# EAGLE board Projet electronique final construct- PIC-PIR - Groupe 5 (EAGLE 9.6.2)
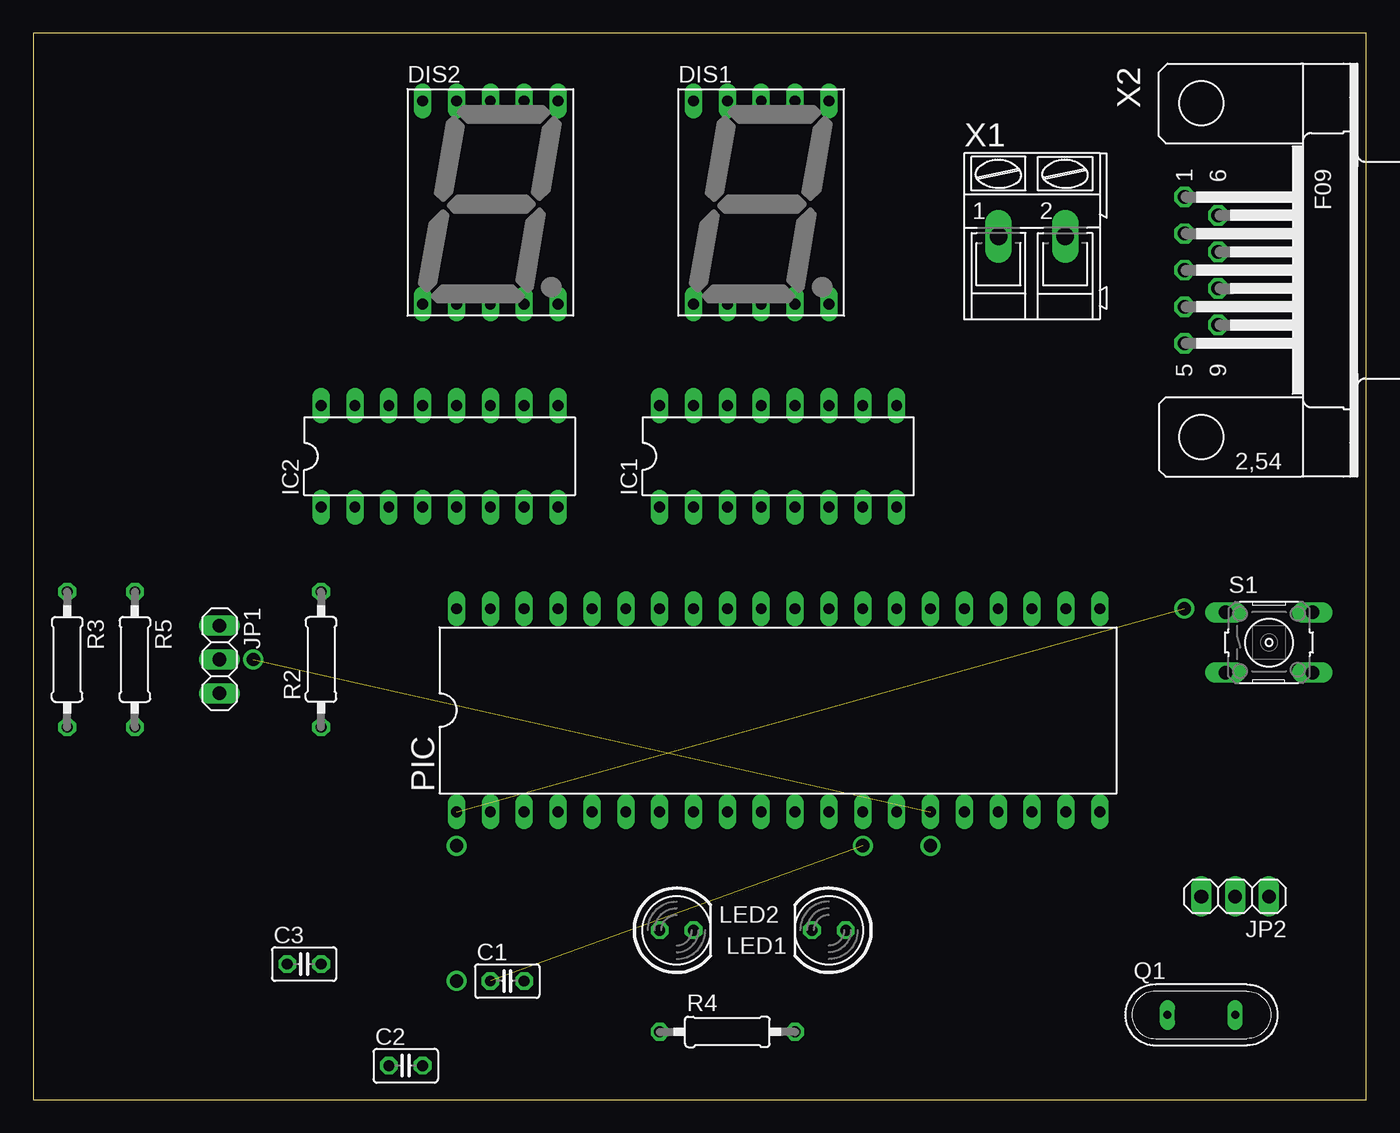
[diagram p0: board, top side]
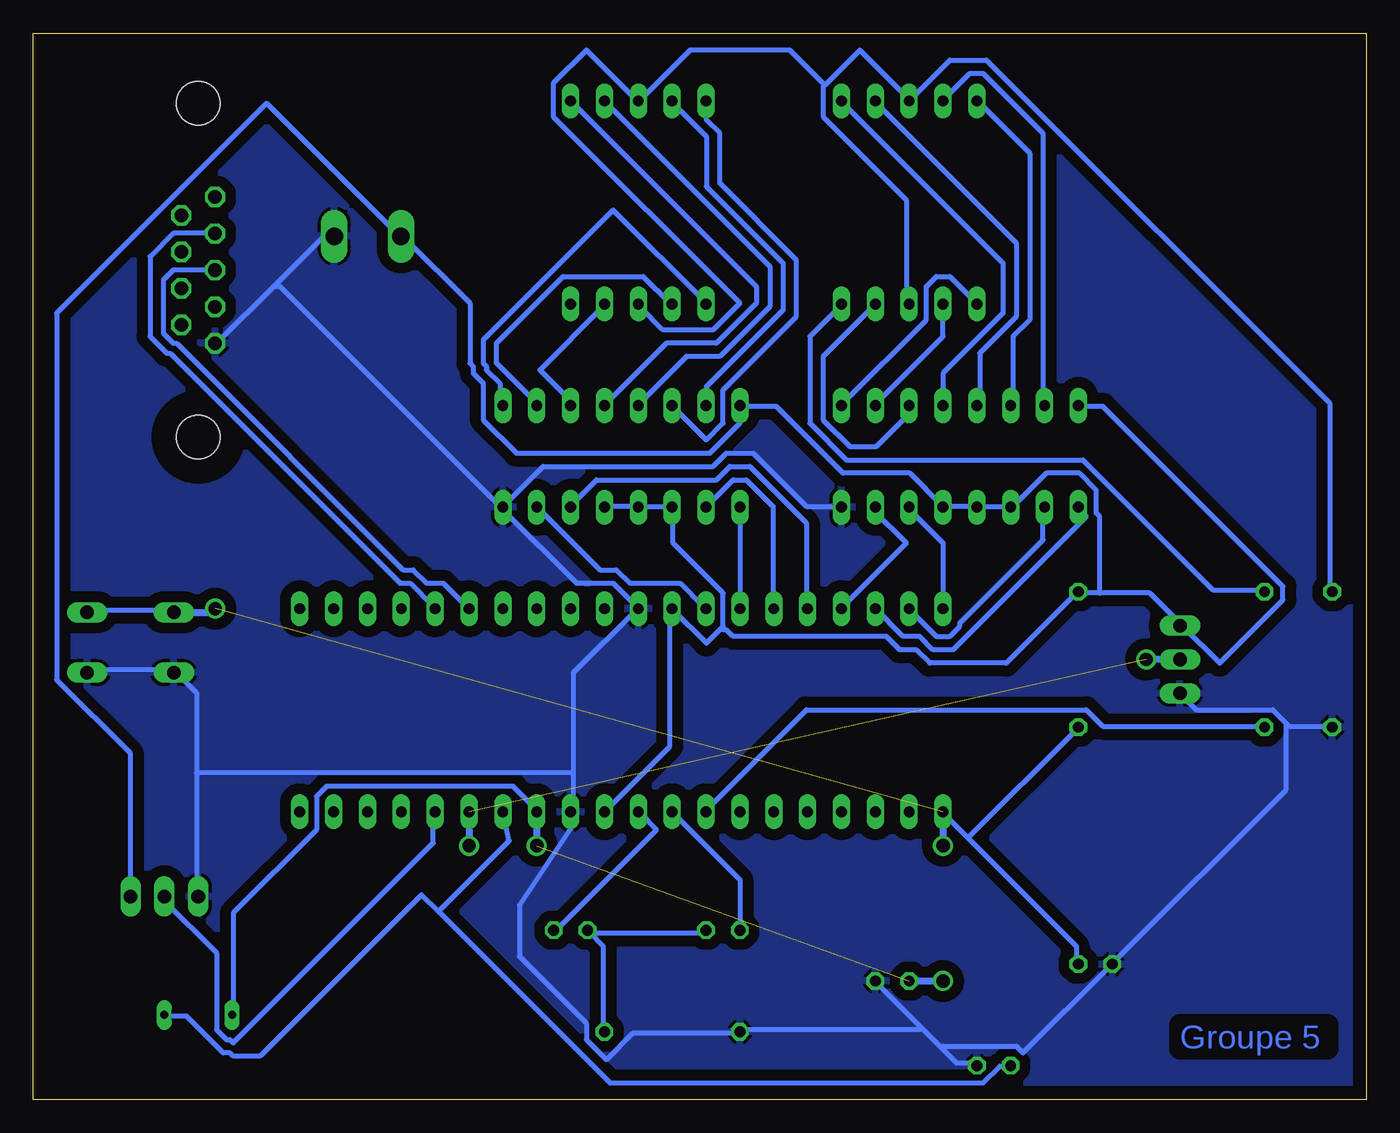
[diagram p1: board, bottom side, seen from below]

Size 100 x 80 mm. Coordinates in mm from the lower left corner, seen from the top.
Outline: 0,0 100,0 100,80 0,80 0,0
Copper layers (1*16): Top 0.035mm / dielectric 1.5mm / Bottom 0.035mm
Design rules "default *": minimum track width 15mil, minimum drill 0.35mm, track to track 15mil, track to pad 15mil, pad to pad 15mil, via to via 15mil, smd to smd 6mil, copper to edge 40mil, drill to drill 6mil, minimum pad ring 10mil, minimum via ring 8mil, stop-mask expansion 4mil, vias tented up to drill 0mil, thermal gap 10mil

## Footprints (pad centres in the part's own frame; a part is rotated, then mirrored left to right if it is on the bottom)
C025-025X050 = drill 0.813 octagon: 1 -1.27,0; 2 1.27,0
HDSP-M = drill 0.813 long: 1 -5.08,-7.62; 2 -2.54,-7.62; 3 0,-7.62; 4 2.54,-7.62; 5 5.08,-7.62; 6 5.08,7.62; 7 2.54,7.62; 8 0,7.62; 9 -2.54,7.62; 10 -5.08,7.62
DIL16 = drill 0.813 long: 1 -8.89,-3.81; 2 -6.35,-3.81; 3 -3.81,-3.81; 4 -1.27,-3.81; 5 1.27,-3.81; 6 3.81,-3.81; 7 6.35,-3.81; 8 8.89,-3.81; 9 8.89,3.81; 10 6.35,3.81; 11 3.81,3.81; 12 1.27,3.81; 13 -1.27,3.81; 14 -3.81,3.81; 15 -6.35,3.81; 16 -8.89,3.81
1X03 = drill 1.016 long: 1 -2.54,0; 2 0,0; 3 2.54,0
LED5MM = drill 0.813 octagon: A -1.27,0; K 1.27,0
DIL40 = drill 0.813 long: 1 -24.13,-7.62; 2 -21.59,-7.62; 3 -19.05,-7.62; 4 -16.51,-7.62; 5 -13.97,-7.62; 6 -11.43,-7.62; 7 -8.89,-7.62; 8 -6.35,-7.62; 9 -3.81,-7.62; 10 -1.27,-7.62; 11 1.27,-7.62; 12 3.81,-7.62; 13 6.35,-7.62; 14 8.89,-7.62; 15 11.43,-7.62; 16 13.97,-7.62; 17 16.51,-7.62; 18 19.05,-7.62; 19 21.59,-7.62; 20 24.13,-7.62; 21 24.13,7.62; 22 21.59,7.62; 23 19.05,7.62; 24 16.51,7.62; 25 13.97,7.62; 26 11.43,7.62; 27 8.89,7.62; 28 6.35,7.62; 29 3.81,7.62; 30 1.27,7.62; 31 -1.27,7.62; 32 -3.81,7.62; 33 -6.35,7.62; 34 -8.89,7.62; 35 -11.43,7.62; 36 -13.97,7.62; 37 -16.51,7.62; 38 -19.05,7.62; 39 -21.59,7.62; 40 -24.13,7.62
QS = drill 0.61 long: 1 -2.54,0; 2 2.54,0
0207/10 = drill 0.813 octagon: 1 -5.08,0; 2 5.08,0
B3F-10XX = drill 1.016 long: 1 -3.251,2.261; 2 3.251,2.261; 3 -3.251,-2.261; 4 3.251,-2.261
AK300/2 = drill 1.321 long: 1 -2.515,0; 2 2.489,0
F09H = drill 1.016 octagon: 1 -5.486,-1.27; 2 -2.743,-1.27; 3 0,-1.27; 4 2.743,-1.27; 5 5.486,-1.27; 6 -4.115,1.27; 7 -1.372,1.27; 8 1.372,1.27; 9 4.115,1.27 | hole 3.302: -12.522,0; 12.522,0

## Placement (x,y rotation side)
C1  [C025-025X050]  35.56,8.89 0 top
C2  [C025-025X050]  27.94,2.54 0 top
C3  [C025-025X050]  20.32,10.16 0 top
DIS1  HD-H103  [HDSP-M]  54.61,67.31 0 top
DIS2  HD-H103  [HDSP-M]  34.29,67.31 0 top
IC1  4511N  [DIL16]  55.88,48.26 0 top
IC2  4511N  [DIL16]  30.48,48.26 0 top
JP1  [1X03]  13.97,33.02 270 top
JP2  [1X03]  90.17,15.24 180 top
LED1  [LED5MM]  59.69,12.7 180 top
LED2  [LED5MM]  48.26,12.7 0 top
PIC  PIC16F877P  [DIL40]  55.88,29.21 0 top
Q1  [QS]  87.63,6.35 0 top
R2  [0207/10]  21.59,33.02 90 top
R3  [0207/10]  2.54,33.02 270 top
R4  [0207/10]  52.07,5.08 0 top
R5  [0207/10]  7.62,33.02 270 top
S1  [B3F-10XX]  92.71,34.29 0 top
X1  [AK300/2]  74.93,64.77 0 top
X2  [F09H]  87.63,62.23 270 top

## Library data of the parts
C1-C3 = rcl; SPICEPREFIX: C
DIS1 DIS2 = display-hp; OC_FARNELL: unknown; OC_NEWARK: unknown
IC1 IC2 = 45xx
JP1 JP2 = pinhead
LED1 LED2 = led
PIC = microchip; MF: MICROCHIP; MPN: PIC16F877-04/P; OC_FARNELL: 9761349; OC_NEWARK: 61K3463
Q1 = special
R2-R5 = rcl; SPICEPREFIX: R
S1 = switch-omron; MPN: B3F-1000; OC_FARNELL: 176432; OC_NEWARK: 36M3542
X1 = con-ptr500; OC_FARNELL: unknown; OC_NEWARK: unknown
X2 = con-subd; OC_FARNELL: unknown; OC_NEWARK: unknown

## Nets
GND: C1.2 C2.2 C3.1 IC1.8 IC2.8 JP1.3 JP2.3 PIC.12 PIC.31 R3.2 R4.1 S1.3 S1.4 X1.2 X2.5
N$1: C2.1 PIC.14 Q1.2
N$2: C1.1 PIC.13 Q1.1
N$3: C3.2 PIC.1 R2.1 S1.1 S1.2
N$4: IC1.7 PIC.33
N$5: IC1.1 PIC.34
N$6: IC1.2 PIC.35
N$7: IC1.6 PIC.36
N$8: IC2.7 PIC.37
N$9: IC2.1 PIC.38
N$10: IC2.2 PIC.39
N$11: IC2.6 PIC.40
N$12: DIS1.7 IC1.13
N$13: DIS1.6 IC1.12
N$14: DIS1.4 IC1.11
N$15: DIS1.2 IC1.10
N$16: DIS1.1 IC1.9
N$17: DIS1.9 IC1.15
N$18: DIS1.10 IC1.14
N$19: DIS2.7 IC2.13
N$20: DIS2.6 IC2.12
N$21: DIS2.4 IC2.11
N$22: DIS2.2 IC2.10
N$23: DIS2.1 IC2.9
N$24: DIS2.9 IC2.15
N$25: DIS2.10 IC2.14
N$26: DIS1.3 DIS1.8 DIS2.3 DIS2.8 R3.1
N$27: LED1.K LED2.K R4.2
N$28: DIS2.5 R5.1
RC0: JP1.2 PIC.15
RC1: JP2.2 PIC.16
RE0: PIC.8 R5.2
RE1: LED2.A PIC.9
RE2: LED1.A PIC.10
RX: PIC.26 X2.3
TX: PIC.25 X2.2
VCC: IC1.3 IC1.4 IC1.5 IC1.16 IC2.3 IC2.4 IC2.5 IC2.16 JP1.1 JP2.1 PIC.11 PIC.32 R2.2 X1.1

## Tracks (layer width: path | path; a pad name or v marks a point on that pad's centre or on a via)
GND
  Bottom 0.381: 5.88,28.12 7,29.25 12.75,29.25 13.75,30.25 JP1.3 | 5.88,28.12 5.75,28 2.75,28 R3.2 | 33.38,5.38 36.75,8.75 C1.2 | 33.38,5.38 31.88,3.88 | 31.88,3.88 30.75,2.75 29.25,2.75 C2.2 | 31.88,3.88 31.75,4 26.25,4 25.75,3.5 19.25,10 C3.1 19,10.25 6,23.25 6,28 5.88,28.12 | 33.38,5.38 33.5,5.25 46.75,5.25 R4.1 47,5 55,5 57,3 58.5,4.5 58.5,5.71 63.52,10.73 63.52,14.57 59.69,20.32 PIC.12 59.5,21.75 59.5,24.5 | 87.75,24.5 87.75,30.5 89.25,32 S1.3 89.5,32.25 95.75,32.25 S1.4 | 87.75,24.5 87.75,15.25 JP2.3 | 81.88,61.12 77.75,65.25 77.5,65 X1.2 | 81.88,61.12 86.25,56.75 X2.5 | IC2.8 39.5,44.5 42,44.5 46,48.5 48,48.5 49,47.5 61.75,47.5 64.75,44.5 IC1.8 | IC1.8 64.75,44.25 59.25,38.75 56.5,38.75 54.75,37 PIC.31 54.75,36.75 59.5,32 59.5,24.5 | 81.88,61.12 81.75,61 81.5,61 65,44.5 IC1.8 | 59.5,24.5 87.75,24.5
  pour Bottom (isolate 0.813): 0,80.01 100.33,80.01 100.33,0 0,0
N$1
  Bottom 0.381: 69.61,14.11 64.29,19.42 PIC.14 | Q1.2 90,6.25 88.5,6.25 85.75,3.5 85.25,3.5 85,3.25 83,3.25 70.88,15.38 69.61,14.11 | 69.61,14.11 56.75,1.25 28.75,1.25 27.5,2.5 26.75,2.5 C2.1
N$2  (1 unrouted)
  Bottom 0.381: Q1.1 85,6.5 85,14 78.75,20.25 78.75,22.75 78,23.5 64,23.5 62.25,21.75 PIC.13
  Bottom 0.508: C1.1 31.75,8.89 | PIC.13 62.23,19.05
N$3  (1 unrouted)
  Bottom 0.381: 29.88,19.62 31.75,21.5 PIC.1 | 29.88,19.62 21.75,11.5 21.75,10.25 C3.2 | 29.88,19.62 21.75,27.75 R2.1 | S1.1 89.5,36.75 95.75,36.75 S1.2
  Bottom 0.508: S1.1 86.64,36.55 86.36,36.83 | PIC.1 31.75,19.05
N$4
  Bottom 0.381: PIC.33 49.75,37 51.5,38.75 55.25,38.75 56.25,39.75 57.5,39.75 62,44.25 IC1.7
N$5
  Bottom 0.381: PIC.34 47,37 47,44.25 IC1.1
N$6
  Bottom 0.381: PIC.35 44.5,37 44.5,44.5 46.5,46.5 47.5,46.5 49.5,44.5 IC1.2
N$7
  Bottom 0.381: PIC.36 42,37 42,43.25 46.25,47.5 47.75,47.5 48.75,46.5 57.75,46.5 59.75,44.5 IC1.6
N$8
  Bottom 0.381: PIC.37 39.25,37 34.5,41.75 37,44.25 IC2.7
N$9
  Bottom 0.381: PIC.38 34.75,34.75 33.5,34.75 32.5,33.75 31,33.75 21,43.75 21.5,44.25 IC2.1
N$10
  Bottom 0.381: IC2.2 24.25,44.25 24.25,42 30.5,35.75 30.5,35.5 31.25,34.75 32.25,34.75 34.25,36.75 PIC.39
N$11
  Bottom 0.381: PIC.40 31.75,41.75 34.25,44.25 IC2.6
N$12
  Bottom 0.381: IC1.13 54.5,52.25 51,55.75 48.5,55.75 44.75,59.5 44.75,62.5 57,74.75 DIS1.7
N$13
  Bottom 0.381: IC1.12 57,52.25 52.5,56.75 48.75,56.75 45.75,59.75 45.75,61 59.5,74.75 DIS1.6
N$14
  Bottom 0.381: DIS1.4 57.25,59.5 62,54.75 59.5,52.25 IC1.11
N$15
  Bottom 0.381: DIS1.2 52.25,59.75 54.25,61.75 60.25,61.75 65.25,56.75 65.25,55.25 62.25,52.25 IC1.10
N$16
  Bottom 0.381: IC1.9 65,52.25 65,53.75 66,54.75 66,55 66.25,55.25 66.25,57 56.5,66.75 49.5,59.75 DIS1.1
N$17
  Bottom 0.381: IC1.15 49.5,52.25 49.5,53.5 43.75,59.25 43.75,62.75 49.5,68.5 49.5,72.25 52,74.75 DIS1.9
N$18
  Bottom 0.381: IC1.14 49.5,49.5 48.25,50.75 48.25,53.25 42.75,58.75 42.75,63 48.5,68.75 48.5,72.5 49.5,73.5 49.5,74.75 DIS1.10
N$19
  Bottom 0.381: IC2.13 29,52.25 29,56 26.25,58.75 26.25,64.25 36.75,74.75 DIS2.7
N$20
  Bottom 0.381: IC2.12 31.75,54.5 27.25,59 27.25,62.75 39.25,74.75 DIS2.6
N$21
  Bottom 0.381: IC2.11 34.5,52 34.5,51.25 36.75,49 38.75,49 40.75,51 40.75,55.75 37,59.5 DIS2.4
N$22
  Bottom 0.381: DIS2.2 31.75,57.25 36.75,52.25 IC2.10
N$23
  Bottom 0.381: DIS2.1 29.25,59.75 31.25,61.75 32.25,61.75 33,61 33,58.5 39.25,52.25 IC2.9
N$24
  Bottom 0.381: IC2.15 24.25,52.25 24.25,72.5 28.75,77 29.75,77 31.75,75 DIS2.9
N$25
  Bottom 0.381: IC2.14 26.5,52.25 26.5,57.25 25.25,58.5 25.25,71 29,74.75 DIS2.10
N$26
  Bottom 0.381: DIS1.3 54.5,59.5 52.75,57.75 49,57.75 47,59.75 61,73.75 61,76.25 58.5,78.75 54.75,75 DIS1.8 54.5,75 50.75,78.75 43.25,78.75 40.62,76.12 | 34.25,75 31.25,78 28.5,78 2.75,52.25 2.75,38.25 R3.1 | 40.62,76.12 38,78.75 34.25,75 | 40.62,76.12 40.75,76 40.75,73.75 34.5,67.5 34.5,59.75 DIS2.3 | 34.25,75 DIS2.8
N$27
  Bottom 0.381: R4.2 57.25,5.25 57.25,11.5 58.25,12.5 LED1.K 58,12.5 49.75,12.5 LED2.K
N$28
  Bottom 0.381: R5.1 7.75,38.25 11.5,38.25 21.25,48 39,48 41.75,50.75 41.75,57.25 39.5,59.5 DIS2.5
N$29  (via drill 1 pad 1.3)
  other vias: 86.36,36.83
N$30  (via drill 1 pad 1.3)
  other vias: 31.75,8.89
N$31  (via drill 1 pad 1.3)
  other vias: 16.51,33.02
N$32  (via drill 1 pad 1.3)
  other vias: 31.75,19.05
N$33  (via drill 1 pad 1.3)
  other vias: 67.31,19.05
N$34  (via drill 1 pad 1.3)
  other vias: 62.23,19.05
RC0  (1 unrouted)
  Bottom 0.508: PIC.15 67.31,19.05 | JP1.2 16.51,33.02
RC1
  Bottom 0.381: PIC.16 70,21.5 70,19.25 85,4.25 85.25,4.5 85.5,4.5 86.25,5.25 86.25,11 90.25,15 JP2.2
RE0
  Bottom 0.381: R5.2 7.75,28 19.75,28 21,29.25 42,29.25 49.5,21.75 PIC.8
RE1
  Bottom 0.381: LED2.A 47,12.75 47,16.5 52,21.5 PIC.9
RE2
  Bottom 0.381: LED1.A 60.75,12.75 53.25,20.25 54.5,21.5 PIC.10
RX
  Bottom 0.381: PIC.26 67.5,37 69.25,38.75 70.5,38.75 71.5,39.75 72.25,39.75 89.25,56.75 89.5,56.75 90.25,57.5 90.25,61.5 89.5,62.25 86.5,62.25 X2.3
TX
  Bottom 0.381: PIC.25 70,37 71.75,38.75 72.5,38.75 89.75,56 90,56 91.25,57.25 91.25,63.25 89.5,65 86.5,65 X2.2
VCC
  Bottom 0.381: IC1.5 57,44.5 54.75,44.5 IC1.4 54.5,44.5 52.25,44.5 IC1.3 52,44.25 52,41.75 48.25,38 48.25,35.5 48.38,35.38 | PIC.11 57,21.75 52.25,26.5 52.25,36.75 PIC.32 52,36.75 49.5,34.25 48.38,35.38 | 31.75,44.5 29.25,44.5 IC2.4 29,44.5 26.75,44.5 IC2.3 26.5,44.5 24,47 21.5,47 20.25,45.75 20.25,44 20,43.75 20,38 | 31.75,44.5 34.25,47 39.25,47 44.25,52 46.75,52 IC1.16 47,52 47,50.75 49.25,48.5 63.75,48.5 66.25,51 66.25,53.75 67,54.5 67,55 67.25,55.25 67.25,59.75 72.25,64.75 X1.1 72.5,64.75 82.5,74.75 98.25,59 98.25,31.5 92.75,26 92.75,15.25 JP2.1 | 31.75,44.5 IC2.5 | 20,38 16.25,38 14,35.75 JP1.1 13.75,35.5 11,32.75 6.25,37.5 6.25,38.5 19.75,52 21.5,52 IC2.16 | 20,38 21.5,38 R2.2 21.75,38 27,32.75 32.75,32.75 33.75,33.75 35,33.75 36,34.75 47.5,34.75 48,35.25 48.25,35.25 48.38,35.38

## Text on the board
Bottom: Groupe 5